# Altium PCB bai1.PcbDoc
Units mm, origin at the board's own origin, x right, y up, seen from the top; angles counter-clockwise.
Board outline 99.76 x 68.33 mm, 2 copper layers (Top Layer, Bottom Layer); 8 components, 7 nets, 20 pads, 0 vias.
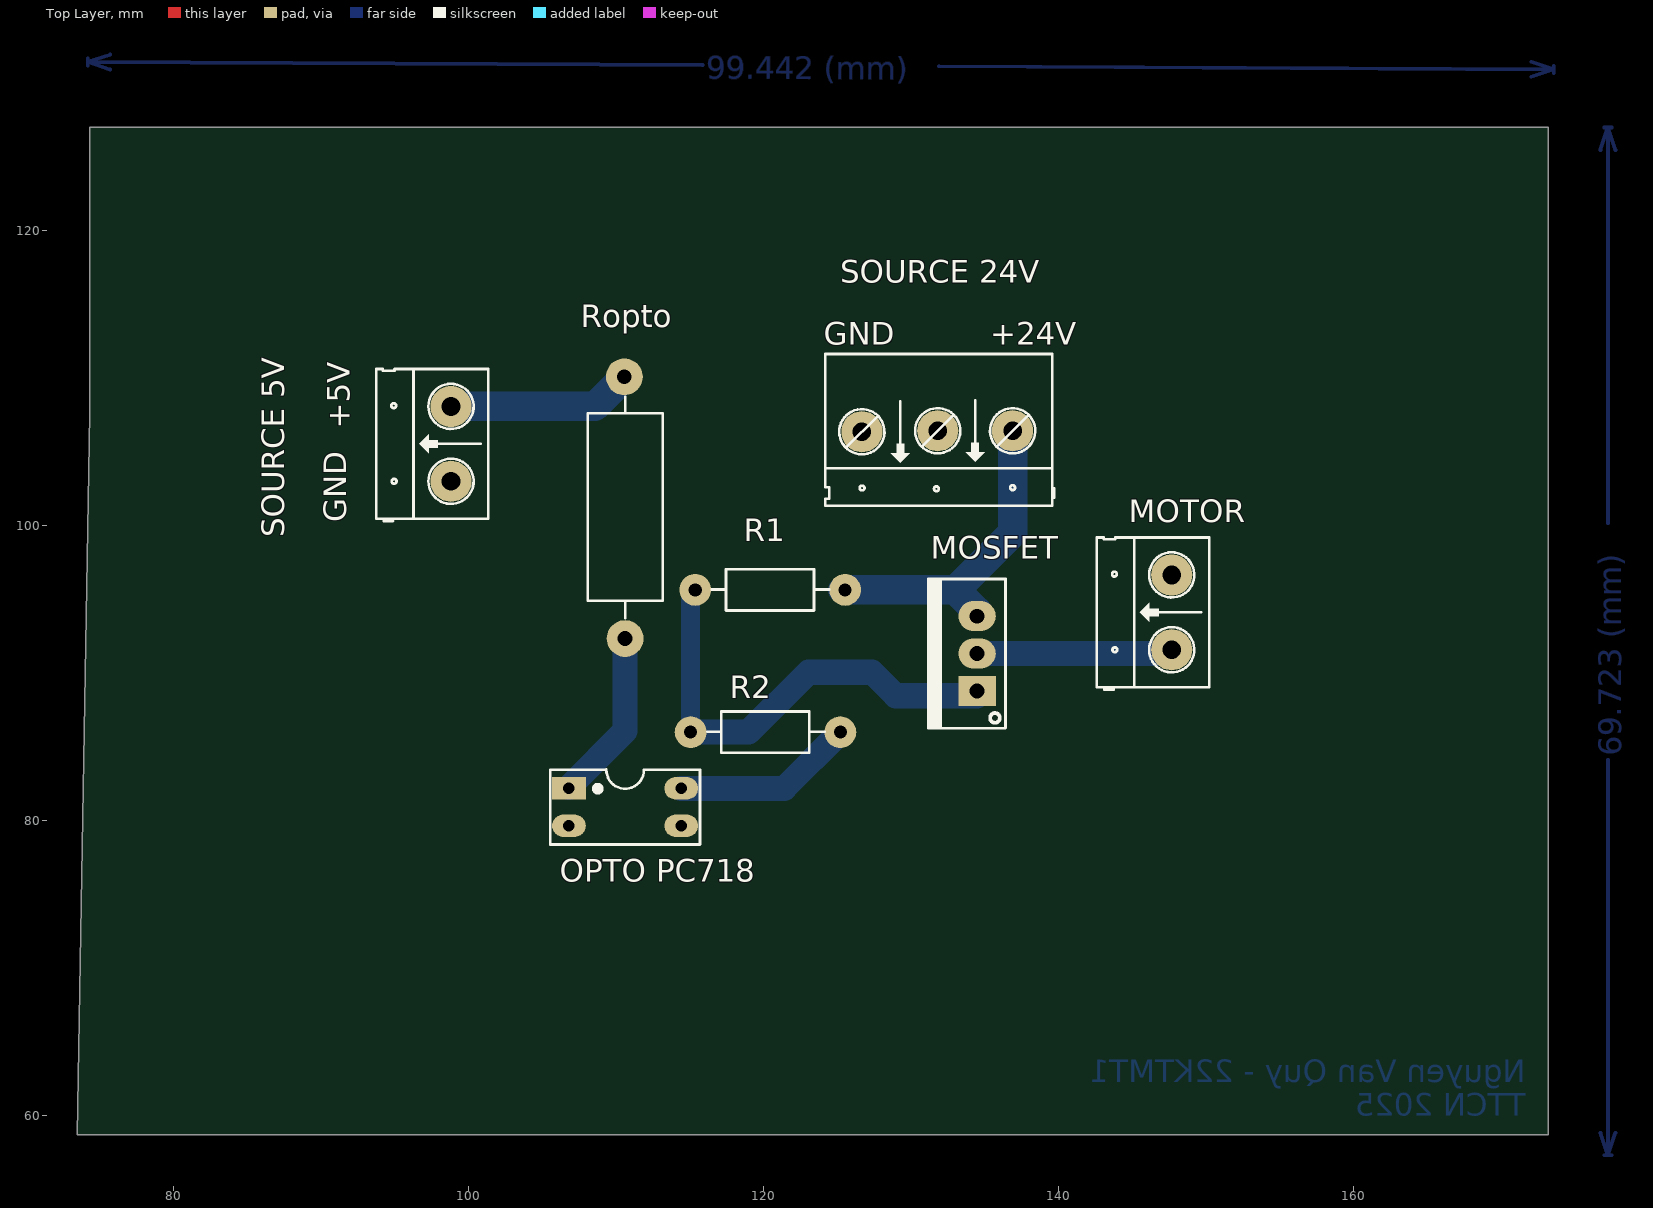
[diagram p0: Top Layer view]
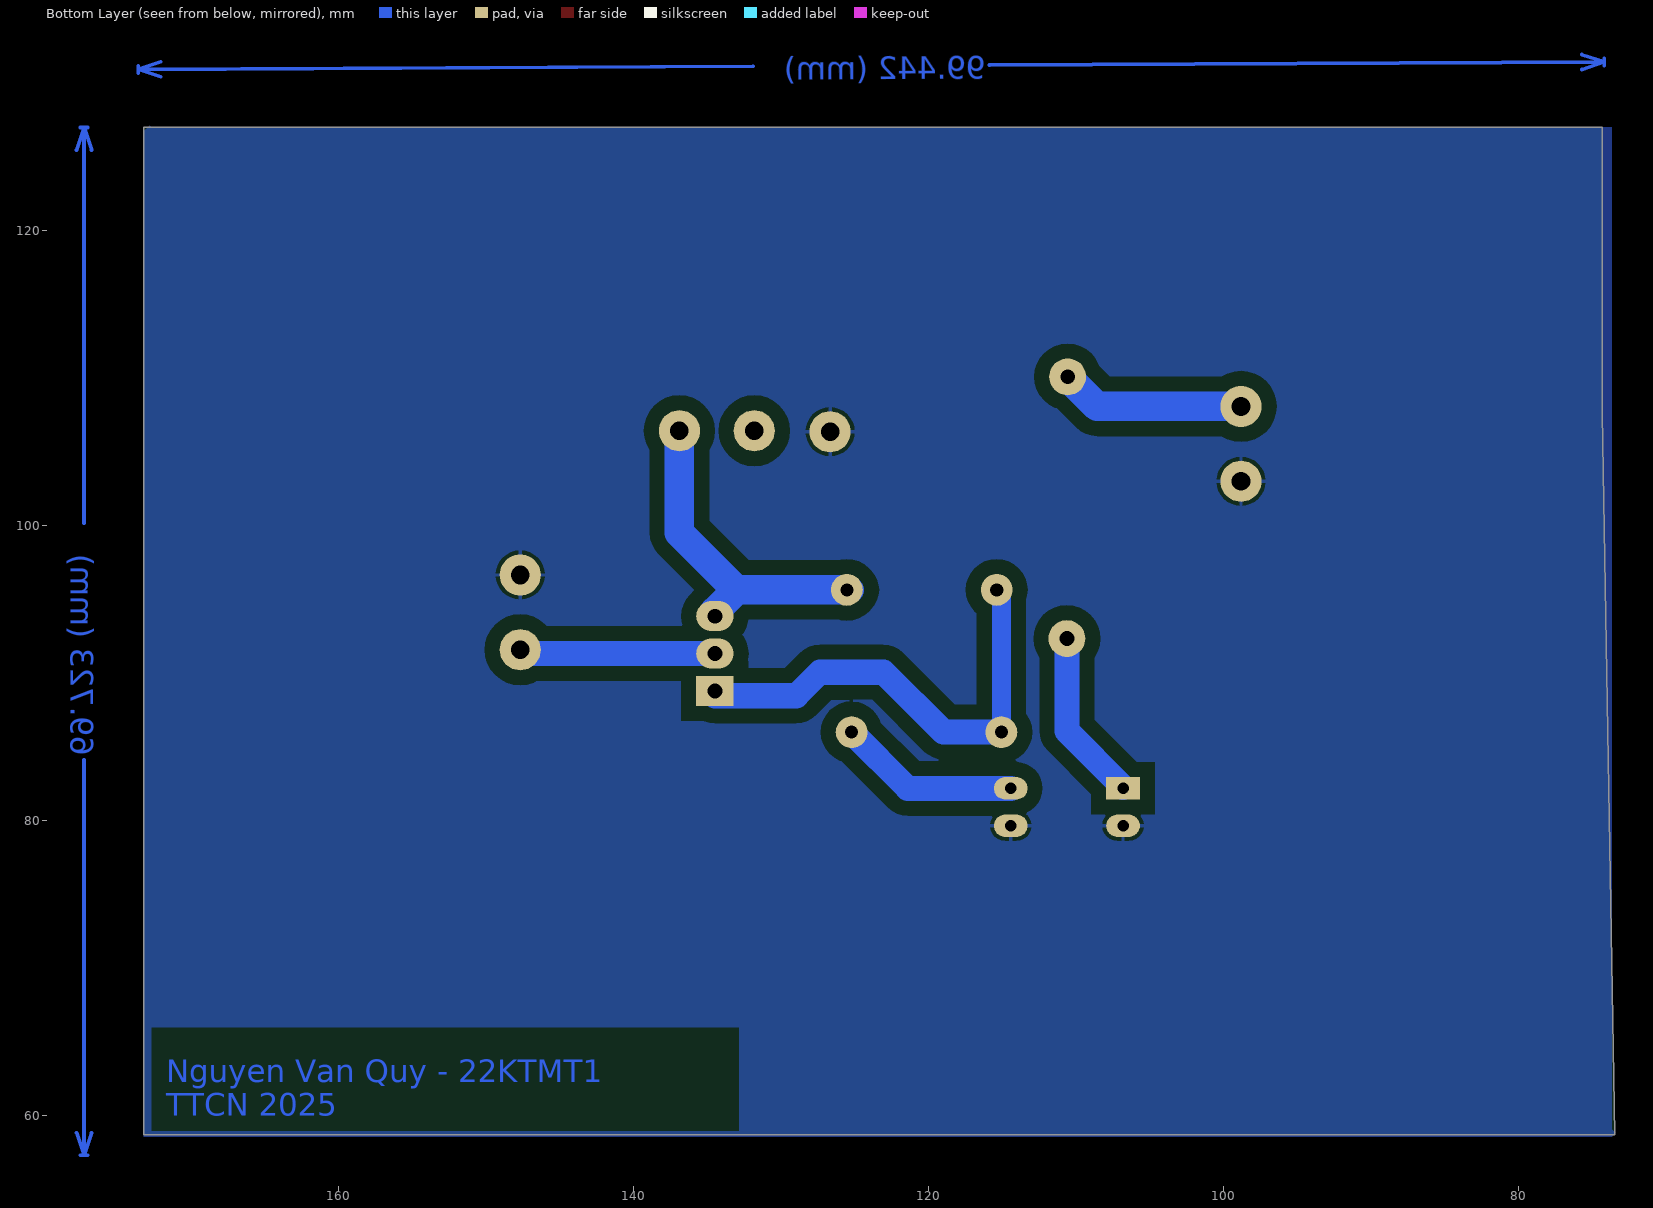
[diagram p1: Bottom Layer view, seen from below]
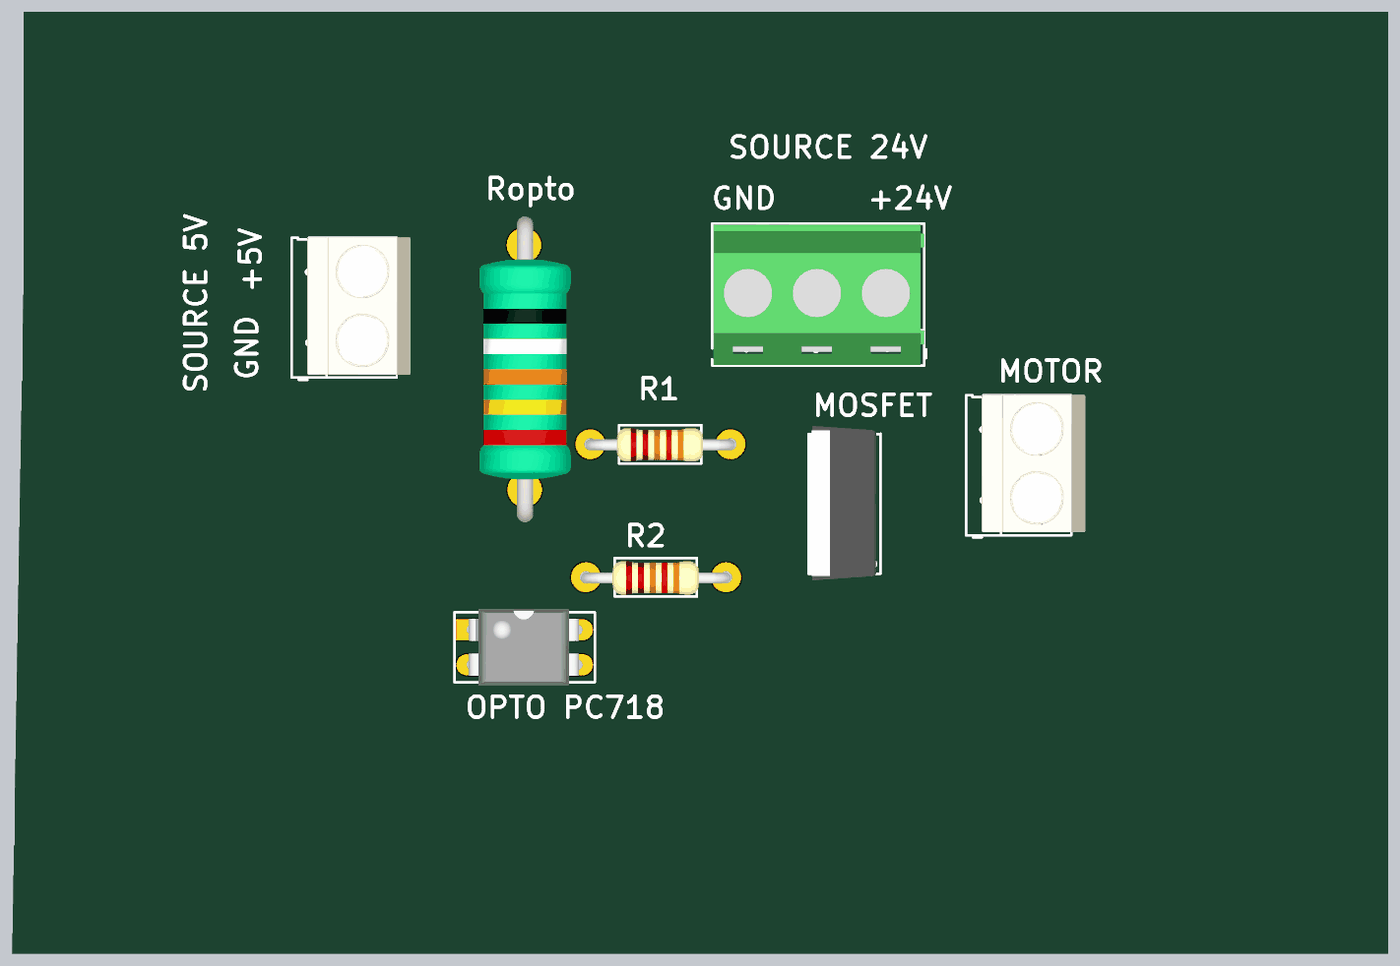
[diagram p2: 3D render of the assembled board from above, using the file's embedded part models]

## Layer stack, top to bottom
Top Solder: solder mask 0.0102, Solder Resist, Dk 3.5
Top Layer: signal copper 0.0356
Dielectric 1: dielectric 0.32, FR-4, Dk 4.8
Bottom Layer: signal copper 0.0356
Bottom Solder: solder mask 0.0102, Solder Resist, Dk 3.5

## Board outline
74.295,107.569 73.466,58.674 101.6,58.674 173.228,58.674 173.228,101.727 173.228,127 74.295,127

## Design rules (kind name [scope] priority, off if disabled: settings)
Clearance [All] p1: gap=1
PolygonConnect [All] p1: connectstyle=Relief reliefconductorwidth=0.254 reliefentries=4 polygonreliefangle="90 Angle" airgapwidth=0.254
RoutingVias [All] p1: holewidth=0.711 width=1.27 viastyle="Through Hole" minholewidth=0.711 minwidth=1.27 maxholewidth=0.711 maxwidth=1.27
SolderMaskExpansion [All] p1: expansion=0.102
Width [All] p1: maxlimit=4 minlimit=1.3 preferedwidth=1.7
30 further rules are at their usual default settings.

## Components (designator, comment, footprint, x,y, rotation, side; value= is the part's Value field where it differs from the comment)
MOSFET "IRF9540" QTO-220 134.493,88.773 r90 top (schematic designator Q?)
MOTOR "Header 2" HED2 147.701,91.567 r90 top
"OPTO PC718" "PC817" DIP4/W0.3 106.807,82.169 r270 top (schematic designator U?)
R1 "2.4k" R1/2W 125.54,95.631 r180 top
R2 "2.4k" R1/2W 125.222,85.979 r180 top
Ropto "220" R2W 110.617,92.329 r90 top
"SOURCE 5V" "Header 2" HED2 98.806,102.997 r90 top
"SOURCE 24V" "Header 3" HED3 136.906,106.426 r180 top

## Footprints (in the part's own frame and the unit in brackets; to place one, negate y for a bottom-side part, rotate by r counter-clockwise, add the part's x,y. Pads: shape width x height; smd on the part's side, far side on the other; paste and mask are expansions set on the pad)
DIP4/W0.3 [mil] "4 PIN, W 300mil, Pin to pin 100mil"
  rect 60x90 hole 31: 1(0,0)
  oval 60x90 hole 31: 2(100,0) 3(100,300) 4(0,300)
  silkscreen extent -50,-50 150,350, body extent -59,-10 159,305, height 170
HED2 [mil] "Header 2, 2 pin, hight 300mil, Pin to Pin 200, Colour Green"
  round 110 hole 50: 1(0,0) 2(200,0)
  silkscreen extent -106,-100 300,200, body extent -92,-140 302,155, height 394
HED3 [mil] "Header 3, 3 pin, hight 300mil, Pin to Pin 200, Colour Green"
  round 110 hole 50: 1(0,0) 2(200,0) 3(402.62,2.62)
  silkscreen extent -111,-205 500,200, body extent -106,-204 496,198, height 560
QTO-220 [mil] "TO-220 - 1-2-3"
  rect 80x100 hole 39: 1(0,0)
  oval 80x100 hole 39: 2(100,0) 3(200,0)
  silkscreen extent -100,-76 300,130, body extent -119,-64 322,121, height 755
R1/2W [mil] "R 1/2W, 2 pin, 300mil"
  round 85 hole 35: 1(0,0) 2(400,0)
  silkscreen extent 42,-55 356,55, body extent -12,-45 414,49, height 91
R2W [mm] "R2W, 2 pin, 700mil"
  round 2.5 hole 1: 1(0,0) 2(17.755,0.051)
  silkscreen extent 1.37,-2.57 16.38,2.54, body extent -2.36,-3.33 19.84,3.27, height 8.3

## Part data
MOSFET: "HEXFET P-Channel Power MOSFET"
MOTOR "SOURCE 5V": library part Hed2, "Header 2 (Green)"
"OPTO PC718": "Single Opto"
R1 R2: library part R1/4W, "Resistor 1/4W"
Ropto: library part R2W, "Resistor 2W"
"SOURCE 24V": library part Hed3, "Header 3 (Green)"

## Nets (pads, with @x,y where several pads share a name; then routed paths per layer and width w, separated by ;. In a path a pad name is that pad's centre, name@x,y a point inside that pad or via, vN(x,y) a via of type N, cw(c..) or ccw(c..) an arc to the next point about the centre after c; other vN are vias at no path point)
+5V: "SOURCE 5V.2" Ropto.2 | length 12.6
  Bottom Layer w2: 98.806,108.077 108.56,108.077 Ropto.2
+24V: "SOURCE 24V.1" MOSFET.3 R1.1 | length 22.3
  Bottom Layer w1.7: R1.1@125.222,95.631 R1.1
  Bottom Layer w2: R1.1 133.041,95.631 ; MOSFET.3@134.493,94.179 133.041,95.631 ; 136.906,106.426 136.906,99.496 133.041,95.631
GND: "OPTO PC718.2" "OPTO PC718.3" "SOURCE 5V.1" "SOURCE 24V.3" MOTOR.2
NetMOTOR_1: MOSFET.2 MOTOR.1 | length 13.3
  Bottom Layer w1.7: MOSFET.2 147.447,91.313 MOTOR.1
NetQ?_1: MOSFET.1 R1.2 R2.2 | length 31.2
  Bottom Layer w1.3: R2.2@115.062,86.106 R1.2@115.062,95.504
  Bottom Layer w1.7: R2.2 118.999,85.979 123.063,90.043 127.381,90.043 128.977,88.447 MOSFET.1@134.493,88.447
NetR2_1: "OPTO PC718.4" R2.1 | length 12.4
  Bottom Layer w1.7: 114.427,82.169 121.412,82.169 R2.1
NetRopto_1: "OPTO PC718.1" Ropto.1 | length 11.7
  Bottom Layer w1.7: 106.807,82.241 110.617,86.051 Ropto.1
pads on no net: "SOURCE 24V.2"
copper on no net: | length 152
  Bottom Layer w0.254: 74.167,131.191 74.169,131.699 ; 75.689,130.929 74.168,131.445 ; 75.695,131.945 74.168,131.445 ; 115.865,131.232 74.168,131.445 ; 131.912,131.15 173.609,130.937 ; 172.082,130.437 173.609,130.937 ; 172.088,131.453 173.609,130.937 ; 173.608,130.683 173.61,131.191 ; 176.784,58.801 177.292,57.277 ; 176.784,125.476 177.292,127 ; 177.038,57.277 177.546,57.277 ; 177.038,127 177.546,127 ; 177.292,84.115 177.292,57.277 ; 177.292,100.162 177.292,127 ; 177.8,58.801 177.292,57.277 ; 177.8,125.476 177.292,127

## Polygon pours and split planes (outlines as drawn)
GND on Bottom Layer "Top Layer-No Net" (solid, pour order 0): 74.295,127 172.72,127 172.847,127.127 173.228,126.746 173.228,58.547 73.66,58.547 73.406,58.801 73.66,59.055 73.66,127

## Other copper
Bottom Layer:
  text "99.442 (mm)" at 116.114,130.317 h1.52 r359.71
  text "69.723 (mm)" at 178.206,84.369 h1.52 r90
  text "Nguyen Van Quy - 22KTMT1  / TTCN 2025" at 171.704,59.944 h1.52

## Silkscreen, mask and mechanical layers (free items; w line width, h text height)
Top Overlay:
  text "GND" at 124.079,112.268 h1.52
  text "+24V" at 135.382,112.268 h1.52
  text "+5V" at 91.948,106.553 h1.52 r90
  text "GND" at 91.694,100.203 h1.52 r90